# Altium PCB MiniGateway4G0409.PcbDoc
Units mil, origin at the board's own origin, x right, y up, seen from the top; angles counter-clockwise.
Board outline 6000 x 4000 mil, 2 copper layers (Top Layer, Bottom Layer); 71 components, 75 nets, 396 pads, 105 vias.
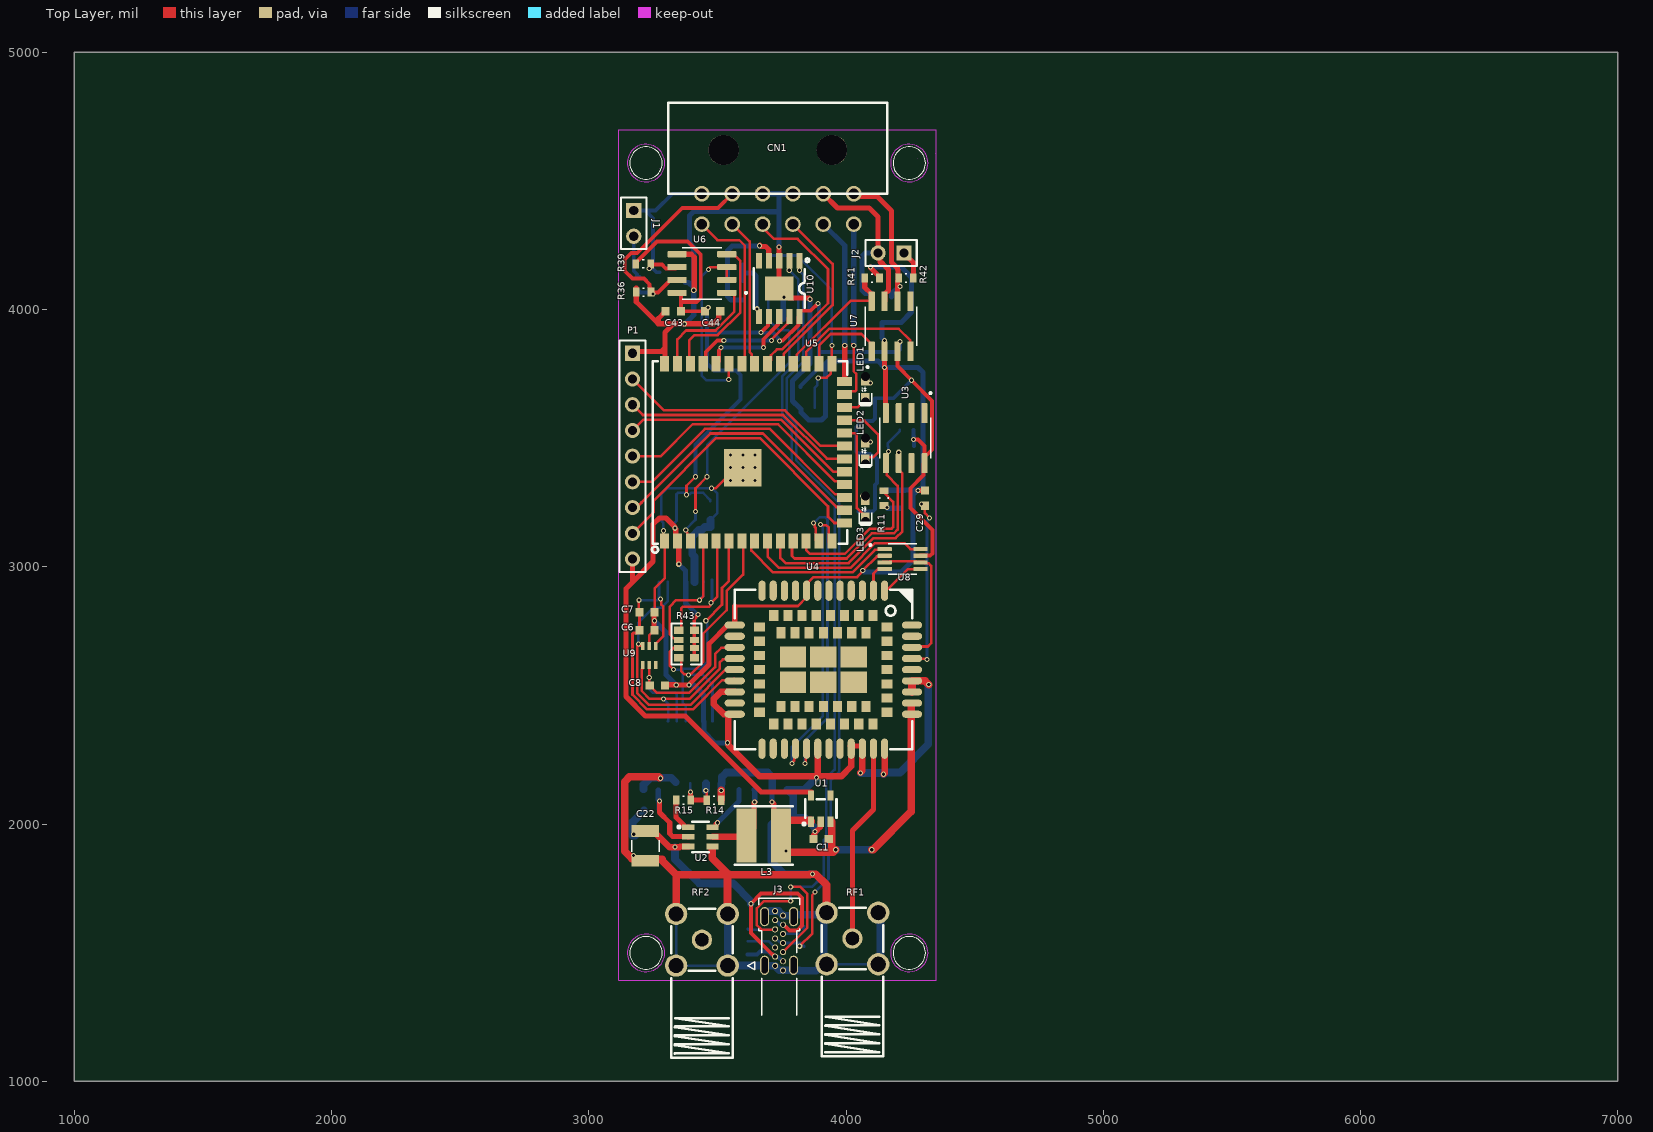
[diagram p0: Top Layer view]
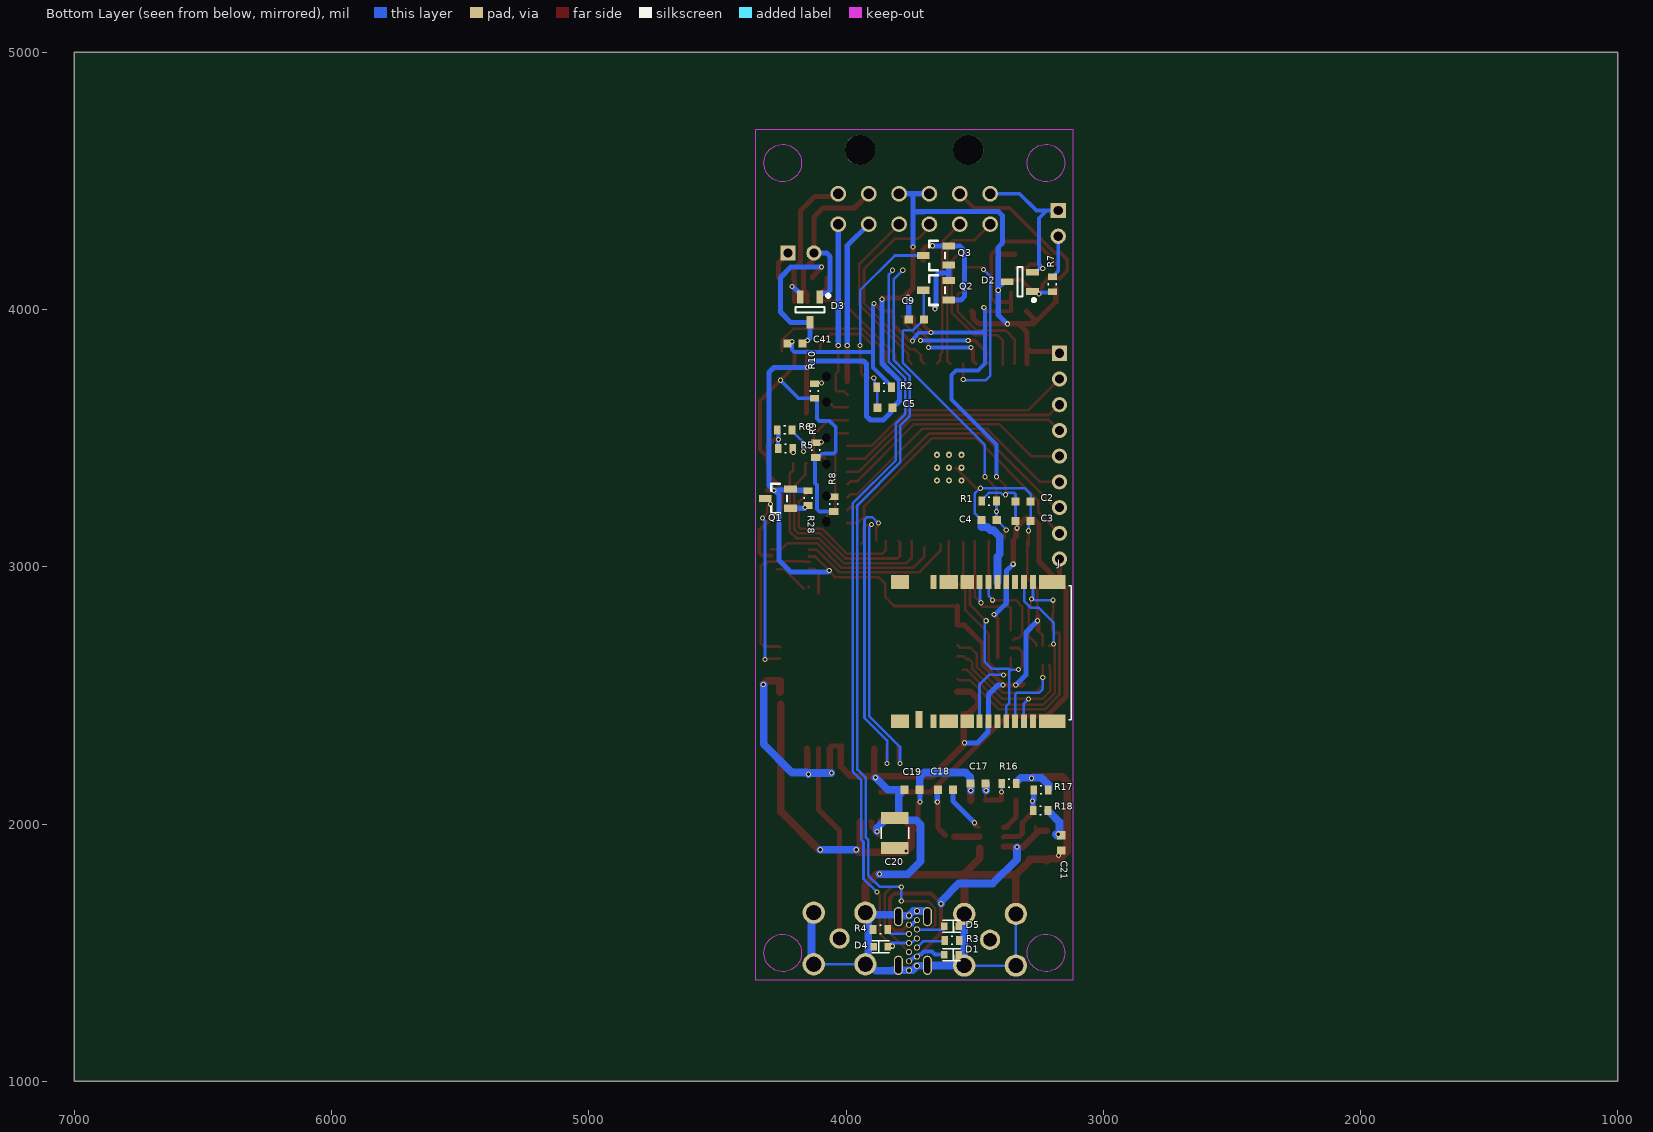
[diagram p1: Bottom Layer view, seen from below]

## Layer stack, top to bottom
Top Solder: solder mask 0.4, Solder Resist, Dk 3.5
Top Layer: signal copper 1.4
Dielectric 1: dielectric 12.6, FR-4, Dk 4.8
Bottom Layer: signal copper 1.4
Bottom Solder: solder mask 0.4, Solder Resist, Dk 3.5

## Board outline
1000,1000 7000,1000 7000,5000 1000,5000

## Design rules (kind name [scope] priority, off if disabled: settings)
Clearance [All] p1: gap=8 ignorepadtopadclearanceinfootprint=FALSE
PolygonConnect [All] p1: connectstyle=Relief reliefconductorwidth=10 reliefentries=4 polygonreliefangle="90 Angle" airgapwidth=10
RoutingVias [All] p1: holewidth=28 width=50 viastyle="Through Hole" minholewidth=28 minwidth=50 maxholewidth=28 maxwidth=50
SolderMaskExpansion [All] p1: expansion=4 istentingtop=FALSE
Width [All] p1: maxlimit=30 minlimit=10 preferedwidth=10
30 further rules are at their usual default settings.

## Classes and differential pairs
component class RS485: C43 C44 D2 J1 R7 R36 R39 U6
component class POWER: C1 C17 C18 C19 C20 C21 C22 L3 R14 R15 R16 R17 R18 U1 U2
component class My4G: C6 C7 C8 C29 J Q1 R11 R28 RF1 U4 U8 U9
component class MCU: C2 C3 C4 C5 C9 CN1 D1 D4 D5 J3 LED1 LED2 LED3 P1 Q2 Q3 R1 R2 R3 R4 R5 R6 R8 R9 R10 R43 RF2 U3 U5 U10
component class CANBUS: C41 D3 J2 R41 R42 U7

## Components (designator, comment, footprint, x,y, rotation, side; value= is the part's Value field where it differs from the comment)
C1 "10uf/0603" CAP0603 3905,1940 r0 top value=10uf
C2 "10uF/0603" CAP0603 3313.25,3255 r0 bottom
C3 "0.1uF/0603" CAp0603 3313.25,3180 r0 bottom value=0.22uF/0603
C4 "0.1uF/0603" CAP0603 3441.75,3180 r180 bottom value=0.1uF
C5 "0.1uF/0603" CAP0603 3850,3620 r0 bottom value=0.1uF
C6 "0.1uF/0603" CAP0603 3225,2755 r180 top
C7 "22pF/0603" CAP0603 3225,2825 r180 top
C8 "22pF/0603" CAP0603 3265,2540 r180 top
C9 "1uF/0603" CAP0603 3725,3960 r180 bottom value=0.1uF
C17 "330pF/0603" CAP0603 3485,2155 r180 bottom value=330pF/0603/25V
C18 "0.1uF/0603" CAP0603 3615,2135 r0 bottom value=0.1uF/0603/50V
C19 "0.1uF/0603" CAP0603 3745,2135 r0 bottom locked value=0.1uF/0603/50V
C20 "22uF/1210" CAP1210-CAPC3225X140N 3810,1965 r90 bottom value=22uF/1210/35V
C21 "0.1uF/0603" CAP0603 3165,1925 r270 bottom value=0.1uF/0603/50V
C22 "10uF/1210" CAP1210-CAPC3225X140N 3220,1915 r270 top value=10uF/1210/35V
C29 "NC" CAP0603 4305,3265 r270 top
C41 "0.1uF/0603" CAP0603 4200,3870 r0 bottom
C43 "0.1uF/0603" CAP0603 3330,3991.42 r0 top value=100pF
C44 "10uf/0603" CAP0603 3480,3995 r180 top value=10uf
CN1 "MX3.0MM-2X6P" 3.0MM-2X6P 3734.7,4555.36 r0 top
D1 "LESD5D5.0CT1G" LESD5D5.0CT1G-SOD-523 3590,1495 r180 bottom
D2 "SM712" SOT95P280X135-3N 3324.21,4107.4 r0 bottom
D3 "SM712" SOT95P280X135-3N 4140,3999.21 r270 bottom
D4 "LESD5D5.0CT1G" LESD5D5.0CT1G-SOD-523 3865,1520 r0 bottom
D5 "LESD5D5.0CT1G" LESD5D5.0CT1G-SOD-523 3590,1605 r180 bottom
J "SIM-TF二合一卡座" MOLEX_104642-1610 3125,2670 r90 bottom locked
J1 "Jumper" HDR1X2 3175,4385 r270 top
J2 "Jumper" HDR1X2 4225,4220 r180 top
J3 "TYPEC Side Plug" "TYPE-C side plug" 3740,1250 r0 top
L3 "10uH" IND-SMD_L4.7-W4.7-6.5uH 3680,1955 r180 top
LED1 "0603LED-红" LED_0603_KA 4075,3690 r90 top
LED2 "0603LED-红" LED_0603_KA 4075,3450 r90 top
LED3 "0603LED-红" LED_0603_KA 4075,3225 r90 top
P1 "Header 9" HDR1X9 3170,3830 r270 top
Q1 "2N7002" SOT-23_2N7002 4265,3265 r180 bottom
Q2 "2N7002" SOT-23_2N7002 3650,4075 r180 bottom
Q3 "2N7002" SOT-23_2N7002 3650,4210 r180 bottom
R1 "10K/0603" RES0603 3445.23,3252.68 r0 bottom
R2 "10k/0603" RES0603 3850,3700 r180 bottom value=10k
R3 "4.7K/0603" RES0603 3590,1545 r0 bottom
R4 "4.7K/0603" RES0603 3864.77,1592.32 r180 bottom
R5 "10K/0603" RES0603 4236.85,3457.32 r0 bottom
R6 "10K/0603" RES0603 4240,3530 r0 bottom
R7 "120R/0603" RES0603 3200,4100 r90 bottom
R8 "2K/0603" RES0603 4050,3245 r90 bottom
R9 "2K/0603" RES0603 4120,3455 r90 bottom
R10 "2K/0603" RES0603 4125,3685 r90 bottom
R11 "2k/0603" RES0603 4150,3265 r270 top
R14 "125k/0603" RES0603 3485,2090 r180 top
R15 "2k/0603" RES0603 3370,2095 r0 top
R16 "30.0k/0603" RES0603 3365,2160 r180 bottom
R17 "2k/0603" RES0603 3240,2135 r180 bottom
R18 "2k/0603" RES0603 3245,2050 r0 bottom
R28 "30.0k/0603" RES0603 4145,3265 r270 bottom
R36 "4.7k/0603" RES0603 3215,4070 r0 top
R39 "4.7k/0603" RES0603 3210,4175 r180 top
R41 "10K/0603" RES0603 4100,4120 r180 top
R42 "120R/0603" RES0603 4235,4125 r0 top
R43 "10k" RES-ARRAY-SMD_8P-L3.2-W1.6-P0.80-BL 3380,2700 r270 top
RF1 "SMA 4脚拐弯射频天线插座" SMA-TH_BWSMA-KWE-Z001 4025.01,1395.42 r270 top
RF2 "SMA弯头外螺内孔转IPEX1代" SMA-TH_BWSMA-KWE-Z001 3440.01,1390.42 r270 top
U1 "ME6217C33-SOT23-5" ME6217C33-SOT23-5 3900,2060 r270 top locked
U2 "SCT2332TVBR" SCT2332TVBR-TSOT23-6 3435,1945 r270 top
U3 "ATECC608" "SOIC127P600X175-8N - duplicate" 4230,3500 r270 top
U4 "A7680C" LCC-LAG_L17.6-W15.7_A7680C 3911.98,2599.99 r0 top
U5 "ESP32-S2-SOLO-U-N8R2" ESP32-S2-SOLO-U 3633.45,3436.62 r90 top
U6 "SP3485" SP3485-SOP8 3440,4140 r180 top locked
U7 "SN65HVD230DR" SN65HVD230DR 4175,3935 r90 top
U8 "TXS0102DCTTG4" TXS0102 4220,3030 r0 top
U9 "SMF05CT1" SMF05C-SC706 3235,2660 r180 top
U10 "CH340K" "ESOP-10_L4.9-W3.9-P1.00-LS6.2-BL-EP CH340K" 3746.81,4081.74 r180 top locked

## Footprints (in the part's own frame and the unit in brackets; to place one, negate y for a bottom-side part, rotate by r counter-clockwise, add the part's x,y. Pads: shape width x height; smd on the part's side, far side on the other; paste and mask are expansions set on the pad)
3.0MM-2X6P [mm]
  round 1.55 hole 1.05 paste+0 mask+0.102: 1(-7.496,-5.676) 2(-7.496,-2.676) 3(-4.496,-5.676) 4(-4.496,-2.676) 5(-1.499,-5.676) 6(-1.499,-2.676) 7(1.501,-5.676) 8(1.501,-2.676) 9(4.501,-5.676) 10(4.501,-2.676) 11(7.501,-5.676) 12(7.501,-2.676)
  round 3 hole 3 paste+0 mask+0.102: 17(5.35,1.644) 18(-5.35,1.644)
  silkscreen extent -10.8,-2.68 10.8,6.32
CAP0603 [mm]
  rect 0.8x0.8 smd: 1(-0.791,0.046) 2(0.709,0.046)
CAp0603 [mm]
  rect 0.8x0.8 smd: 1(-0.791,0.046) 2(0.709,0.046)
CAP1210-CAPC3225X140N [mm] "CAP1210"
  rect 1.16x2.72 smd: 1(-1.475,0) 2(1.475,0)
  silkscreen extent -0.57,-1.35 0.57,1.35
"ESOP-10_L4.9-W3.9-P1.00-LS6.2-BL-EP CH340K" [mm] "CH340K"
  rect 0.6x1.5 smd paste+0 mask+0.051: 1(-1.843,-2.75) 2(-0.843,-2.75) 3(0.157,-2.75) 4(1.157,-2.75) 5(2.157,-2.75) 6(2.157,2.75) 7(1.157,2.75) 8(0.157,2.75) 9(-0.843,2.75) 10(-1.843,2.75)
  rect 2.8x2.4 smd paste+0 mask+0.051: 11(0.157,0)
  silkscreen extent -2.78,-2.96 2.66,2
ESP32-S2-SOLO-U [mm]
  rect 1.5x0.9 smd paste+0 mask+0.05: 1(-8.55,8.597) 2(-8.55,7.327) 3(-8.55,6.057) 4(-8.55,4.787) 5(-8.55,3.517) 6(-8.55,2.247) 7(-8.55,0.977) 8(-8.55,-0.293) 9(-8.55,-1.563) 10(-8.55,-2.833) 11(-8.55,-4.103) 12(-8.55,-5.373) 13(-8.55,-6.643) 14(-8.55,-7.913) 27(8.95,-7.913) 28(8.95,-6.643) 29(8.95,-5.373) 30(8.95,-4.103) 31(8.95,-2.833) 32(8.95,-1.563) 33(8.95,-0.293) 34(8.95,0.977) 35(8.95,2.247) 36(8.95,3.517) 37(8.95,4.787) 38(8.95,6.057) 39(8.95,7.327) 40(8.95,8.597)
  rect 0.9x1.5 smd paste+0 mask+0.05: 15(-6.785,-9.163) 16(-5.515,-9.163) 17(-4.245,-9.163) 18(-2.975,-9.163) 19(-1.705,-9.163) 20(-0.435,-9.163) 21(0.835,-9.163) 22(2.105,-9.163) 23(3.375,-9.163) 24(4.645,-9.163) 25(5.915,-9.163) 26(7.185,-9.163)
  rect 3.7x3.7 smd paste+0 mask+0.05: 41(-1.3,0.877)
  silkscreen extent -9.7,-9.41 9.2,9.85
HDR1X2 [mm] "Connector; Header; 2 Position"
  rect 1.5x1.5 hole 0.9: 1(0,0)
  round 1.5 hole 0.9: 2(2.54,0)
  silkscreen extent -1.27,-1.27 3.81,1.27
HDR1X9 [mm] "Connector; Header; 9 Position"
  rect 1.5x1.5 hole 0.9: 1(0,0)
  round 1.5 hole 0.9: 2(2.54,0) 3(5.08,0) 4(7.62,0) 5(10.16,0) 6(12.7,0) 7(15.24,0) 8(17.78,0) 9(20.32,0)
  silkscreen extent -1.27,-1.27 21.59,1.27
IND-SMD_L4.7-W4.7-6.5uH [mm] "6.5uH"
  rect 2x5.3 smd paste+0 mask+0.051: 1(-1.7,0) 2(1.7,0)
  silkscreen extent -2.85,-2.9 2.85,2.9
LCC-LAG_L17.6-W15.7_A7680C [mm] "A7680C"
  oval 0.7x2 smd paste+0 mask+0.051: 1(6.05,7.8) 2(4.95,7.8) 3(3.85,7.8) 4(2.75,7.8) 5(1.65,7.8) 6(0.55,7.8) 7(-0.55,7.8) 8(-1.65,7.8) 9(-2.75,7.8) 10(-3.85,7.8) 11(-4.95,7.8) 12(-6.05,7.8) 22(-6.05,-7.8) 23(-4.95,-7.8) 24(-3.85,-7.8) 25(-2.75,-7.8) 26(-1.65,-7.8) 27(-0.55,-7.8) 28(0.55,-7.8) 29(1.65,-7.8) 30(2.75,-7.8) 31(3.85,-7.8) 32(4.95,-7.8) 33(6.05,-7.8)
  oval 2x0.7 smd paste+0 mask+0.051: 13(-8.75,4.4) 14(-8.75,3.3) 15(-8.75,2.2) 16(-8.75,1.1) 17(-8.75,0) 18(-8.75,-1.1) 19(-8.75,-2.2) 20(-8.75,-3.3) 21(-8.75,-4.4) 34(8.75,-4.4) 35(8.75,-3.3) 36(8.75,-2.2) 37(8.75,-1.1) 38(8.75,0) 39(8.75,1.1) 40(8.75,2.2) 41(8.75,3.3) 42(8.75,4.4)
  rect 0.9x1.1 smd paste+0 mask+0.051: 43(4.9,5.35) 44(3.5,5.35) 45(2.1,5.35) 46(0.7,5.35) 47(-0.7,5.35) 48(-2.1,5.35) 49(-3.5,5.35) 50(-4.9,5.35) 58(-4.9,-5.35) 59(-3.5,-5.35) 60(-2.1,-5.35) 61(-0.7,-5.35) 62(0.7,-5.35) 63(2.1,-5.35) 64(3.5,-5.35) 65(4.9,-5.35) 73(4.2,3.65) 74(2.8,3.65) 75(1.4,3.65) 76(0,3.65) 77(-1.4,3.65) 78(-2.8,3.65) 79(-4.2,3.65) 80(-4.2,-3.65) 81(-2.8,-3.65) 82(-1.4,-3.65) 83(0,-3.65) 84(1.4,-3.65) 85(2.8,-3.65) 86(4.2,-3.65)
  rect 1.1x0.9 smd paste+0 mask+0.051: 51(-6.3,4.2) 52(-6.3,2.8) 53(-6.3,1.4) 54(-6.3,0) 55(-6.3,-1.4) 56(-6.3,-2.8) 57(-6.3,-4.2) 66(6.3,-4.2) 67(6.3,-2.8) 68(6.3,-1.4) 69(6.3,0) 70(6.3,1.4) 71(6.3,2.8) 72(6.3,4.2)
  rect 2.6x2.1 smd paste+0 mask+0.051: 87(3,1.25) 88(0,1.25) 89(-3,1.25) 90(-3,-1.25) 91(0,-1.25) 92(3,-1.25)
  silkscreen extent -8.76,-7.87 8.76,7.87
LED_0603_KA [mil]
  rect 31.5x31.5 smd paste+0 mask+2: 1(30,0) 2(-30,0)
  round 30 hole 35 paste+0 mask+1.97: 1(50,0) 2(-50,0)
  silkscreen extent -61,-25 10,23
LESD5D5.0CT1G-SOD-523 [mm] "TVS LESD5D5.0CT1G  乐山无线电"
  rect 0.65x0.75 smd paste+0 mask+0.051: 1(-0.7,-0.074) 2(0.7,-0.074)
  silkscreen extent -0.85,-0.67 0.85,0.53
ME6217C33-SOT23-5 [mm] "SOT-23-5_L3.0-W1.7-P0.95-LS2.8-BR"
  rect 1x0.6 smd paste+0 mask+0.051: 1(1.3,-0.899) 2(1.3,0.05) 3(1.3,1) 4(-1.3,1.001) 5(-1.3,-0.899)
  silkscreen extent -0.9,-1.73 1.65,1.6
MOLEX_104642-1610 [mm]
  rect 1.35x2.6 smd: G1(-6.875,1.85) G8(6.875,1.85)
  rect 1.35x1.34 smd: G2(-6.875,10.25) G7(6.875,10.25)
  rect 1.35x1.84 smd: G3(-6.875,12.09) G6(6.875,12.09)
  rect 1.35x1.8 smd: G4(-6.875,16.9) G5(6.875,16.9)
  rect 1.35x0.58 smd: S1_C1(6.875,3.76) S2_C2(6.875,4.64) S3_C3(-6.875,4.64) S4(-6.875,3.76) S5_C4(6.875,7.28) S6_C5(6.875,5.52) S7_C6(-6.875,5.52) S8(-6.875,7.28) T1(6.875,13.6) T2(6.875,9.04) T3(6.875,8.16) T4(6.875,6.4) T5(-6.875,6.4) T6(-6.875,8.16) T7(-6.875,9.04) T8(-6.875,13.6)
  rect 1.7x0.7 smd: S/W(-6.7,15.015)
  silkscreen extent -6.7,0 6.5,0.23
RES0603 [mm]
  rect 0.65x0.9 smd: 1(-0.768,-0.059) 2(0.682,-0.059)
  silkscreen extent -0.12,-0.46 0.04,0.34
RES-ARRAY-SMD_8P-L3.2-W1.6-P0.80-BL [mm]
  rect 0.75x0.9 smd paste+0 mask+0.051: 1(-1.35,-0.77) 4(1.35,-0.77) 5(1.35,0.77) 8(-1.35,0.77)
  rect 0.58x0.9 smd paste+0 mask+0.051: 2(-0.4,-0.77) 3(0.4,-0.77) 6(0.4,0.77) 7(-0.4,0.77)
  silkscreen extent -2.02,-1.47 2.02,1.47
SCT2332TVBR-TSOT23-6 [mm] "SCT2332TVBR"
  rect 0.55x1.2 smd paste+0 mask+0.051: 1(-1.077,-1.228) 2(-0.127,-1.228) 3(0.823,-1.228) 4(0.823,1.172) 5(-0.127,1.172) 6(-1.077,1.172)
  silkscreen extent -1.63,-2.28 1.37,0.77
SMA-TH_BWSMA-KWE-Z001 [mm]
  round 2.2 hole 1.45 slot 1.455 at 0 deg paste+0 mask+0.051: 1(-6.604,-2.55) 2(-6.604,2.55) 3(-1.504,2.55) 4(-1.504,-2.55)
  round 2 hole 1.3 slot 1.305 at 0 deg paste+0 mask+0.051: 5(-4.053,0)
  silkscreen extent -7.1,-3.05 7.58,3.05
SMF05C-SC706 [mm] "SMF05C"
  rect 0.35x0.8 smd paste-1 mask+0: 1(-0.65,-0.823) 2(0,-0.823) 3(0.65,-0.823) 4(0.65,1.077) 5(0,1.077) 6(-0.65,1.077)
SN65HVD230DR [mm]
  rrect25% 1.97x0.6 smd: 1(-2.47,1.905) 2(-2.47,0.635) 3(-2.47,-0.635) 4(-2.47,-1.905) 5(2.47,-1.905) 6(2.47,-0.635) 7(2.47,0.635) 8(2.47,1.905)
  silkscreen extent -4.14,-2.52 1.95,2.52, body extent -3,-2.45 3,2.45, height 1.75
"SOIC127P600X175-8N - duplicate" [mm]
  rrect25% 1.97x0.59 smd: 1(-2.475,1.905) 2(-2.475,0.635) 3(-2.475,-0.635) 4(-2.475,-1.905) 5(2.475,-1.905) 6(2.475,-0.635) 7(2.475,0.635) 8(2.475,1.905)
  silkscreen extent -4.54,-2.52 2,2.59
SOT95P280X135-3N [mm] "SM712"
  rect 1.25x0.65 smd: 1(-1.25,0.95) 2(-1.25,-0.95) 3(1.25,0)
  silkscreen extent -1.48,-1.45 0.25,1.9
SOT-23_2N7002 [mm]
  rect 1.25x0.7 smd paste+0 mask+0.102: 1(1.25,-0.95) 2(1.25,0.95) 3(-1.25,0)
  silkscreen extent -0.65,-1.46 0.9,1.46
SP3485-SOP8 [mm]
  rrect25% 1.9x0.6 smd: 1(-2.455,1.905) 2(-2.455,0.635) 3(-2.455,-0.635) 4(-2.455,-1.905) 5(2.455,-1.905) 6(2.455,-0.635) 7(2.455,0.635) 8(2.455,1.905)
  silkscreen extent -4.45,-2.52 1.95,2.52, body extent -3,-2.45 3,2.45, height 1.75
TXS0102 [mm]
  rrect25% 1.42x0.4 smd: 1(-1.77,0.975) 2(-1.77,0.325) 3(-1.77,-0.325) 4(-1.77,-0.975) 5(1.77,-0.975) 6(1.77,-0.325) 7(1.77,0.325) 8(1.77,0.975)
  silkscreen extent -3.29,-1.5 1.4,1.5, body extent -2,-1.47 2,1.47, height 1.3
"TYPE-C side plug" [mm]
  round 0.6 hole 0.4 mask+0.064: A1(-0.39,5.05) A4(-0.39,5.95) A5(-0.39,6.85) A6(-0.39,7.75) A7(-0.39,8.65) A9(-0.39,9.55) A12(-0.39,10.45) B1(0.39,10) B4(0.39,9.1) B5(0.39,8.2) B6(0.39,7.3) B7(0.39,6.4) B9(0.39,5.5) B12(0.39,4.6)
  oval 0.9x1.9 hole 0.6 slot 1.6 at 90 deg mask+0.064: SH1(-1.43,5.1) SH2(1.43,5.1) SH3(-1.43,9.9) SH4(1.43,9.9)
  silkscreen extent -3.1,0.15 2.03,11.7

## Part data
C1 C43 C44: library part "Cap Semi", "Capacitor (Semiconductor SIM Model)", LatestRevisionDate=29-May-2009, LatestRevisionNote="IPC-7351 Footprint Added.", PackageDescription="Chip Capacitor", PackageReference=C1206, Published=8-Jun-2000, Publisher="Altium Limited"
C2 C3 C4 C5 C9: library part C0805C220J5RAC7800, "CAP CER SMD 0805 22PF 5% 50V X7R", Capacitance=22pF, Device Package="0805 (2012 Metric)", Manufacturer=KEMET, Operating Temperature="-55°C ~ 125°C", Supplier Part Number 1=399-17625-1-ND, Temperature Coefficient=X7R, Tolerance=±5%, Voltage - Rated=50V, Applications="Bypass, Decoupling", ComponentLink1Description=Datasheet, ComponentLink1URL=https://api.kemet.com/component-edge/download/datasheet/C0805C220J5RAC7800.pdf, ComponentLink2Description="DigiKey Link", ComponentLink2URL=http://digikey.com/product-detail/en/kemet/C0805C220J5RAC7800/399-17625-1-ND/8572625, LastUpdated="02.09.2020 01:04:09", Lifecycle Status=Active, Minimum Order=1, Mounting Type="Surface Mount, MLCC", Package / Case="0805 (2012 Metric)", Packaging=TapeAndReel, Part Number=C0805C220J5RAC7800, Part Status=Active, PartId=17442, Price=0.03, Series="SMD Comm X7R", Size / Dimension="0.079\" L x 0.049\" W (2.00mm x 1.25mm)", Supplier 1=DigiKey, Thickness (Max)="0.035\" (0.88mm)"
C6 C7 C8 C29: library part Discrete_C*_-0603, Add into BOM=yes, Convert to PCB=yes, Device=Discrete_C*_-0603, Origin Footprint=0603, Symbol=Discrete_C*_-0603
  C6: Name=0.1uF
  C7: Name=33pF
  C8: Name=22pF/0603
  C29: Name=NC
C17 C18 C19 C20 C21 C22: library part CAP0603, "SURFACE MOUNT CAPACITOR 0.031 X 0.061 INCHES", Manufacturer #1="IPC SM-782 STD.", Add into BOM=yes, Convert to PCB=yes, Device=CAP0603, Name=CAP0603, OldName=CAP0603, Origin Footprint=0603, PCB DECAL=0603, Sim_Analog_Order=Model$, Symbol=CAP0603
C41: library part 100nF, JLCPCB Part Class="Basic Part", Manufacturer=SAMSUNG, Manufacturer Part=CL05B104KO5NNNC, Add into BOM=yes, Convert to PCB=yes, Device=100nF, Name=100nF, Origin Footprint=C0402_NEW, Supplier=LCSC, Supplier Part=C1525, Symbol=100nF
CN1: library part A2005WR-2X6P
D1 D4 D5: JLCPCB Part Class="Extended Part", Manufacturer="Leshan Radio", Add into BOM=yes, Convert to PCB=yes, Device=LESD5D5.0CT1G, Manufacturer Part=LESD5D5.0CT1G, Name=LESD5D5.0CT1G, Origin Footprint=SOD-523_L1.2-W0.8-LS1.6-BI, Supplier=LCSC, Supplier Part=C383211, Symbol=LESD5D5.0CT1G
D2 D3: library part SM05_D24, Part Number=702112964, Design=3, Origin=Altium, PCB Footprint=SOT95P280X135-3N
J: library part 104642-1610, "17 (16 + 1) Position Card Connector Combo - microSDâ„¢, Micro SIM Surface Mount, Right Angle Gold or Gold-Palladium", Package=None, Availability=Warning, MF=Molex, Mouser-Purchase-URL=https://snapeda.com/shop?store=Mouser&id=501052, MP=104642-1610, Price=None, SnapEDA_Link=https://www.snapeda.com/parts/104642-1610/Molex/view-part/501052/?ref=snap
J1 J2: library part "Header 2", "Header, 2-Pin", LatestRevisionDate=17-Jul-2002, LatestRevisionNote="Re-released for DXP Platform.", Publisher="Altium Limited"
J3: Package=None, Availability=Unavailable, MF="{'manufacturer': u'Molex'}", MP=2169890001, Price=None
L3: library part IND-MOLDED, "0503贴片电感", Description" MOLDED INDUCTOR, 0_5="PIN SPACING", Add into BOM=yes, Convert to PCB=yes, Device=IND-MOLDED, Name=IND-MOLDED, OldName=IND-MOLDED, Origin Footprint=L_0650, PCB DECAL=L_0650, Sim_Analog_Order=Model$, Sim_Analog_Prefix=L, Symbol=IND-MOLDED
LED1 LED2 LED3: library part LED, "0603LED-红，兼容直插", JLCPCB Part Class="Basic Part", Manufacturer=EVERLIGHT, Manufacturer Part=19-217/GHC-YR1S2/3T, Add into BOM=yes, Convert to PCB=yes, Device=19-217/GHC-YR1S2/3T, Name=19-217/GHC-YR1S2/3T, Origin Footprint=LED0603-R-RD, Supplier=LCSC, Supplier Part=C72043, Symbol=19-217/GHC-YR1S2/3T
P1: "Header, 9-Pin", LatestRevisionDate=17-Jul-2002, LatestRevisionNote="Re-released for DXP Platform.", Publisher="Altium Limited"
Q1 Q2 Q3: "Nmos 2N7000, 2N7002, NDS7002A"
R1 R2 R5 R6: library part RPC0805JT100R-UP, "RES, PULSE, 0805, 5%, 100 OHM, 0", Device Package="0805 (2012 Metric)", Manufacturer="Stackpole Electronics Inc", Operating Temperature="-55°C ~ 155°C", Power (Watts)="0.5W, 1/2W", Ratings=AEC-Q200, Resistance="100 Ohms", Supplier Device Package=0805, Supplier Part Number 1=RPC0805JT100R-UPCT-ND, Temperature Coefficient=±200ppm/°C, Tolerance=±5%, ComponentLink1Description=Datasheet, ComponentLink1URL=https://www.seielect.com/catalog/sei-rpc.pdf, ComponentLink2Description="DigiKey Link", ComponentLink2URL=http://digikey.com/product-detail/en/stackpole-electronics-inc/RPC0805JT100R-UP/RPC0805JT100R-UPCT-ND/10109071, Composition="Thick Film", Features="Automotive AEC-Q200, Pulse Withstanding", Height - Seated (Max)="0.024\" (0.60mm)", LastUpdated="02.09.2020 01:15:08", Lifecycle Status=Active, Minimum Order=1, Number of Terminations=2, Package / Case="0805 (2012 Metric)", Packaging=TapeAndReel, Part Number=RPC0805JT100R-UP, Part Status=Active, PartId=35188, Price=0.02, Series=RPC, Size / Dimension="0.079\" L x 0.049\" W (2.00mm x 1.25mm)", Supplier 1=DigiKey
R3 R4: library part 5.1K, JLCPCB Part Class="Basic Part", Manufacturer=UniOhm, Manufacturer Part=0402WGF5101TCE, Add into BOM=yes, Convert to PCB=yes, Device=5.1K, Name=5.1K, Origin Footprint=R0402, Supplier=LCSC, Supplier Part=C25905, Symbol=5.1K
R7 R14 R15 R16 R17 R18: library part Res2, "Resistor", LatestRevisionDate=17-Jul-2002, LatestRevisionNote="Re-released for DXP Platform.", PackageDescription="Axial Device, Thru-Hole; 2 Leads; 0.4 in Pin Spacing", PackageReference=AXIAL-0.4, Published=8-Jun-2000, Publisher="Altium Limited"
R8 R9 R10: library part 2.2K, JLCPCB Part Class="Basic Part", Manufacturer=UniOhm, Manufacturer Part=0402WGF2201TCE, Add into BOM=yes, Convert to PCB=yes, Device=2.2K, Name=2K/0603, Origin Footprint=R0402, Supplier=LCSC, Supplier Part=C25879, Symbol=2.2K
R11 R36 R39: library part Res2, LatestRevisionDate=17-Jul-2002, LatestRevisionNote="Re-released for DXP Platform.", PackageDescription="Axial Device, Thru-Hole; 2 Leads; 0.4 in Pin Spacing", PackageReference=AXIAL-0.4, Published=8-Jun-2000, Publisher="Altium Limited"
R28: library part Discrete_R*_-0603, Add into BOM=yes, Convert to PCB=yes, Device=Discrete_R*_-0603, Name=47K/0603, Origin Footprint=R0603, Symbol=Discrete_R*_-0603
R41: library part 10K, JLCPCB Part Class="Basic Part", Manufacturer=UniOhm, Manufacturer Part=0402WGF1002TCE, Add into BOM=yes, Convert to PCB=yes, Device=10K, Name=10K, Origin Footprint=R0402, Supplier=LCSC, Supplier Part=C25744, Symbol=10K
R42: library part 120, JLCPCB Part Class="Extended Part", Manufacturer=RALEC, Manufacturer Part=RTT061200FTP, Add into BOM=yes, Convert to PCB=yes, Device=120, Name=120, Origin Footprint=R1206, Supplier=LCSC, Supplier Part=C159715, Symbol=120
R43: library part 2.2K排阻-4D03, "电阻排-4D03"
RF1: library part BWSMA-KWE-Z001
RF2: library part BWSMA-KWE-Z001, "SMA 4脚拐弯射频天线插座，https://item.taobao.com/item.htm?abbucket=8&id=645371264157&ns=1&sku_properties=1627207:22096496743&spm=a21n57.1.item.1.71b2523c1yKr0E"
U1: library part ME6217C33M5G, "4.2v-3.3v LDO"
U2: "3.8V-32V Vin, 3A Synchronous Step-down DCDC Converter"
U3: library part 24CXX, "microchip 加密芯片 IIC，SOIC封装"
U4: library part A7680C-LAAS, "4G cat1 module"
U5: library part ESP32-S2-SOLO-U-N4
U6: "485总线芯片"
U7: "3.3 V CAN Transceiver with Standby Mode", Package="SOIC-8 Texas Instruments", Availability="In Stock", Check_prices=https://www.snapeda.com/parts/SN65HVD230DR/Texas+Instruments/view-part/?ref=eda, MF="Texas Instruments", MP=SN65HVD230DR, Price=None, Purchase-URL=https://pricing.snapeda.com/search/part/SN65HVD230DR/?ref=eda, SnapEDA_Link=https://www.snapeda.com/parts/SN65HVD230DR/Texas+Instruments/view-part/?ref=snap
U8: "2-Bit Bidirectional Voltage-Level Shifter for Open-Drain and Push-Pull Application 8-SM8 -40 to 85", Package="SSOP-8 Texas Instruments", Check_prices=https://www.snapeda.com/parts/TXS0102DCTTG4/Texas+Instruments/view-part/?ref=eda, MF="Texas Instruments", MP=TXS0102DCTTG4, SnapEDA_Link=https://www.snapeda.com/parts/TXS0102DCTTG4/Texas+Instruments/view-part/?ref=snap
U9: "12.5V Clamp 8A (8/20Âµs) Ipp Tvs Diode Surface Mount SC-88/SC70-6/SOT-363", Package="SOT-363 ON Semiconductor", Availability="In Stock", Check_prices=https://www.snapeda.com/parts/SMF05CT1/Onsemi/view-part/?ref=eda, MF="ON Semiconductor", MP=SMF05CT1, Price=None, Purchase-URL=https://pricing.snapeda.com/search/part/SMF05CT1/?ref=eda, SnapEDA_Link=https://www.snapeda.com/parts/SMF05CT1/Onsemi/view-part/?ref=snap
U10: "usb转串口，用于下载使用。"

## Via types
v1: diameter 20, hole 12, Top Layer to Bottom Layer, 96 vias
v2: diameter 24, hole 12, Top Layer to Bottom Layer, 9 vias

## Nets (pads, with @x,y where several pads share a name; then routed paths per layer and width w, separated by ;. In a path a pad name is that pad's centre, name@x,y a point inside that pad or via, vN(x,y) a via of type N, cw(c..) or ccw(c..) an arc to the next point about the centre after c; other vN are vias at no path point)
A7680PWR: C29.2 Q1.3 U4.39 | length 668.7
  Top Layer w10: U4.39 4258.12,2641.65 4313.35,2641.65 v1(4315,2640) ; C29.2 4306.79,3208.21 v1(4325,3190)
  Bottom Layer w10: v1(4315,2640) 4315,3177.29 4325,3187.29 v1(4325,3190)
  other v1: 4293,3243.3
CAN0_H: CN1.10 D3.1 J2.2 U7.7 | length 863
  Top Layer w20: CN1.10 3966.9,4395 4090,4395 4125,4360 J2.2 4132.47,4212.53 4132.47,4184.24 4136.72,4180 4140.89,4180 4165,4155.89 4165,4074.21 4151.81,4061.02 4151.81,4034.06 U7.7
  Bottom Layer w20: D3.1 4102.6,4060.24 4099.8,4063.03 4073.28,4063.03 4061.57,4074.75 4061.57,4206.57 4075,4220 J2.2
CAN0_L: CN1.12 D3.2 R42.1 U7.6 | length 583.1
  Top Layer w20: CN1.12@4038.52,4440 4120,4440 4177.47,4382.53 4177.47,4183.02 4200,4160.49 4200,4155 4201.97,4153.03 4201.97,4120.55 4204.77,4117.76 4200,4112.99 U7.6
  Bottom Layer w20: D3.2 4177.4,4060.24 4207.17,4090 v1(4210,4090)
CAN0_RS: R41.2 U5.30 U7.8 | length 515.4
  Top Layer w10: U5.30@3795.79,3789.48 3808.51,3802.2 3808.51,3824.42 4018.14,4034.06 U7.8@4098.19,4034.06
  Top Layer w20: R41.2 4073.15,4086.06 4098.19,4061.02 U7.8@4098.19,4034.06
CAN0_RX: U5.29 U7.4 | length 549.3
  Top Layer w10: U5.29@3845.79,3789.48 3845,3790.27 3845,3835.46 3934.54,3925 4205,3925 4250,3880 U7.4
CAN0_TX: U5.28 U7.1 | length 337.5
  Top Layer w10: U5.28@3895.79,3789.48 3895.79,3860.79 3940,3905 4059.72,3905 4093.19,3871.54 4100,3864.72 U7.1
DTR: Q2.1 Q3.2 U10.4 | length 461
  Top Layer w20: v1@3665,4250 3670,4245 3687.73,4245 3699.45,4233.28 3699.45,4191.81 U10.4
  Bottom Layer w20: Q2.1 3552.4,4037.6 3540,4050 3540,4230 3557.4,4247.4 Q3.2 v1@3662.4,4247.4
  other v1: 3664.3,4247.78
EN: C4.2 C9.2 Q2.3 R1.1 U5.3 | length 1242.4
  Top Layer w10: v1@3375.18,3140 3377.65,3140 3378.97,3138.68 3378.97,3136.22 3383.07,3132.11 3383.07,3113.66 U5.3@3395,3101.73 ; v1(3415,3215) 3415,3305 v1(3460,3350)
  Bottom Layer w10: v1(3377.06,3143.3) 3377.06,3145 C4.2 3415,3182.95 v1(3415,3215) R1.1 ; v1(3460,3350) 3460,3473.94 3780,3793.94 3780,3914.14 3774.14,3920 3738.89,3920 C9.2 3697.1,4072.9 Q2.3
ESP32-RF: RF2.5
ESPIO0: C5.2 Q3.3 R2.1 U5.27 | length 805.3
  Top Layer w10: v1(3892,3733.3) 3893.76,3735.06 3925.06,3735.06 3940,3750 3940,3783.69 3945.79,3789.48 3945,3790.27 v1(3945,3860.5)
  Bottom Layer w10: Q3.3 3810,4210 3945,4075 v1(3945,3860.5) ; C5.2 3877.9,3695.34 3888.03,3705.47 3888.03,3726.62 3892,3730.59 v1(3892,3733.3)
ESPSCL: R5.1 U3.6 U5.10 | length 871.4
  Top Layer w10: U5.10 3745,3034 3765,3014 4010.09,3014 4107.44,3111.35 4193.14,3111.35 4219,3137.21 4219,3362.92 4213.14,3368.78 4211.61,3368.78 4205,3375.39 U3.6
  other v1: 4205,3445
ESPSDA: R6.1 U3.5 U5.11 | length 904.6
  Top Layer w10: U5.11 3790,3095 3790,3042 3800,3032 4002.63,3032 4100.89,3130.26 4186.6,3130.26 4201,3144.66 4201,3314 4158.67,3356.33 4158.67,3398.89 U3.5
  Bottom Layer w10: v1(4165.84,3447.79) 4163.93,3449.7 4163.93,3468.03 4162.16,3469.8 4162.16,3479.8 4209.77,3527.4 R6.1
GND: C1.1 C2.1 C3.1 C4.1 C5.1 C6.1 C7.1 C8.1 C9.1 C19.2 C20.2 C21.2 C22.2 C29.1 C41.1 C43.1 C44.1 CN1.6 CN1.8 D1.2 D2.3 D3.3 D4.2 D5.2 J3.A1 J3.A12 J3.B1 J3.B12 J3.SH1 J3.SH2 J3.SH3 J3.SH4 J.S5_C4 J.T6 P1.1 Q1.2 R3.1 R4.1 R16.2 R17.2 R28.1 R36.1 R41.1 RF1.1 RF1.2 RF1.3 RF1.4 RF2.1 RF2.2 RF2.3 RF2.4 U1.2 U2.4 U3.4 U4.8 U4.13 U4.19 U4.21 U4.27 U4.30 U4.31 U4.33 U4.36 U4.37 U5.1 U5.40 U5.41 U6.5 U7.2 U8.2 U9.2 U10.3 U10.11 | length 15686.5
  Top Layer w10: U9.2 3235,2732.05 C6.1 v1@3256.15,2790.22 ; v1(3255,2790) C7.1@3255,2818.21 ; C7.1 3256.15,2916.15 3295.79,2955.79 U5.1@3295.79,3100.52 ; U5.1@3290,3082.92 v1(3290,3140) ; C8.1@3304.36,2545 3313.68,2545 ; v1@3480,3305 3493.51,3305 U5.41@3573.94,3385.43 ; 3567.5,2847.5 3813.04,2847.5 3847.03,2881.49 U4.8 3847.03,2932.67 3874.36,2960 4042.71,2960 4065,2982.29 v1(4065,2985) 4119.92,3039.92 4142.44,3039.92 U8.2@4145.31,3042.8 ; C29.1@4304.65,3298.3 C29.1
  Top Layer w20: P1.1 3176.5,3836.5 3282.15,3836.5 3295.79,3850.14 ; R36.1@3184.77,4082.68 3184.77,4030.23 3270,3945 ; C6.1@3253.8,2753.68 C7.1@3253.8,2810.95 ; U5.40@3295.79,3789.48 3295.79,3850.14 ; C43.1 3270,3964.36 3270,3945 ; 3313.68,2541.2 3338.8,2541.2 v1(3340,2540) 3341,2541 v1(3389,2541) 3468,2620 3468,2700.95 3540.26,2773.21 U4.13 3567.5,2847.5 ; 3329.54,3944.54 3295.79,3910.79 3295.79,3850.14 ; U6.5 3398.28,4215 3410,4203.28 3410,4076.72 v1(3408.28,4075) ; C44.1 3505.41,3987.46 3505.41,3965.41 3484.54,3944.54 v1(3372.17,3944.54) 3371.72,3945 3329.54,3945 3270,3945 ; v1(3739.3,4242.78) 3739.45,4242.64 3739.45,4183.81 3740,4183.26 U10.11@3740,4081.74 ; U10.11@3741.26,4081.74 3778.5,4044.49 3855.51,4044.49 v1(3860,4040) ; CN1.8@3790,4450 CN1.8 ; C1.1@3873.85,1956.79 3880,1962.95 v1(3880,1971.5) ; v1@3880,1971.14 3883.85,1971.14 3900.18,1987.46 3900.18,2006.77 U1.2@3902.22,2008.82 ; U4.30@4015.26,2302.91 U4.31@4058.55,2302.91 ; v1(4095,4165) 4095,4162.48 4130.23,4127.24 R41.1 ; U7.2 v1(4150,3775) 4153.39,3771.61 U3.4@4153.39,3597.49 ; v1(4279.69,3296.1) 4302.45,3296.1 C29.1@4304.65,3298.3
  Top Layer w25: U4.19 3513.38,2513.38 3486.25,2486.25 3486.25,2465.54 3524.53,2427.25 3542.11,2427.25 3542.6,2426.76 3542.6,2307.4 3665,2185 v1@3880,2185 ; U4.27 3890.32,2185 3981.1,2185 4020.25,2224.15 U4.30 ; v1(4055.87,2198.4) 4063.55,2206.08 U4.31 ; v1(4145.87,2193.4) 4150.18,2197.71 U4.33
  Top Layer w30: C22.2@3173.85,1864.76 3212.17,1864.76 C22.2 ; C22.2@3183.85,1864.76 3168.44,1864.76 3139.63,1893.57 3139.63,2164.63 3158.28,2183.28 3271.72,2183.28 v1@3275,2180 ; C22.2@3230,1862.45 3285.71,1862.45 ; 3285.71,1856.93 3339.61,1803.03 ; RF2.1 3339.61,1803.03 ; U2.4@3480,1905 3480,1866.93 3539.61,1807.32 RF2.2@3539.61,1655.4 ; RF1.1 3924.61,1762.77 3882.38,1805 3860,1805 3858.03,1803.03 3539.61,1803.03 3339.61,1803.03 ; U4.36 U4.37 4306.77,2556.68 v1(4321.62,2541.83)
  Bottom Layer w10: v1(3290,3140) 3290,3170.31 C3.1 C2.1 3282.1,3282.1 3305,3305 3480,3305 3500,3285 3500,3208.89 C4.1 ; RF2.1 RF2.4 RF2.3 ; RF1.4 RF1.3 RF1.2
  Bottom Layer w20: v1(3255,2790) 3300,2745 3300,2580 v1(3340,2540) ; v1(3372.17,3944.54) 3373.69,3944.54 3408.28,3979.14 v1(3408.28,4075) v1@3408.28,4084.35 ; D2.3 3376.22,4104.61 3388.03,4104.61 v1@3408.28,4084.35 ; v1(3389,2541) 3390,2540 3409.21,2540 3446.26,2502.95 J.T6 3447.68,2397.91 3447.68,2357.32 3490,2315 v1@3540,2315 ; CN1.6 3740,4450 ; v1@3740,4245 3740,4380 ; C9.1 3756.15,4041.15 v1@3760,4045 ; CN1.8 3740,4450 ; v1(3860,4040) 3860,3790.5 3792.35,3722.85 3792.35,3644.7 C5.1 3824.59,3612.46 3824.59,3600.41 3855,3570 3905,3570 3920,3585 3920,3788.28 3931.72,3800 4125,3800 v1(4150,3775) 4280,3775 4300,3755 4300,3315 4281.78,3296.78 v1@4279.01,3296.78 ; v1(4065,2985) 4070,2980 4215,2980 4260,3025 4260,3279.64 4277.14,3296.78 v1@4279.01,3296.78 ; v1(4095,4165) 4215,4165 4255,4125 4255,3990 4215,3950 D3.3 4140,3890 v1(4150,3880) ; R28.1@4151.48,3298.2 4152.28,3297.4 Q1.2@4228.41,3297.4 ; Q1.2@4228.41,3298.3 4277.49,3298.3 v1@4279.01,3296.78 ; v1(4279.69,3296.1) v1@4279.01,3296.78 ; v1@3408.28,4084.35 3408.28,4241.72 3391.09,4258.91 3391.09,4364.78 3406.72,4380.41 3695.79,4380.41 3696.2,4380 3740,4380 ; 3740,4380 3740,4450
  Bottom Layer w30: R17.2@3213.15,2135.39 3213.15,2153.15 3240,2180 3320.57,2180 R16.2@3338.15,2162.43 ; J.S5_C4 3411.39,2940.9 3411.39,3039.23 3402.43,3048.19 3402.43,3117.43 3428.04,3143.04 3439.12,3143.04 3451.08,3155 3472.9,3155 C4.1 ; RF2.3@3539.81,1461.03 RF2.2@3539.81,1640.23 ; RF2.3 3540.99,1450.2 3683.11,1450.2 J3.SH1 3685.67,1448.82 J3.A1 3724.65,1448.01 3740.94,1431.72 3754.73,1431.72 J3.B12 3793.79,1431.1 J3.SH2@3796.3,1433.61 ; J3.SH3 3683.7,1657.98 3686.21,1660.49 3704.43,1660.49 3705.35,1661.42 J3.A12 3738.44,1661.42 3755.35,1644.51 J3.B1 J3.SH4@3793.79,1643.7 ; C20.2@3795,2044.02 3795,2111.11 C19.2 3838.21,2133.21 v1(3885,2180) ; J3.SH2 J3.SH2@3796.3,1433.61 ; J3.SH4 3796.3,1645.07 3798.81,1647.58 3916.79,1647.58 RF1.1 ; C20.2@3810,2015 3727.57,2015 3710,1997.43 3710,1855 3760,1805 v1(3870,1805) ; C20.2 3840.71,2023.07 3880,1983.78 v1(3880,1971.5) ; RF1.4@3913.7,1445.79 RF1.4@3913.7,1454.61 ; RF1.1@3913.7,1620 RF1.4@3913.7,1454.61 ; RF1.4 RF1.4@3913.7,1454.61 ; v1@4056.79,2197.9 v1@4145.87,2197.9 ; RF1.3@4133.7,1445.79 RF1.2@4133.7,1634.76 ; v1(4145.87,2193.4) 4152.47,2200 4210,2200 4320,2310 v1@4320,2540 ; J3.SH2@3796.3,1433.61 3796.3,1432.57 3798.81,1430.06 3817.02,1430.06 3817.09,1430 3884.68,1430 3909.29,1454.61 RF1.4@3913.7,1454.61
  other v1: 3173.85,1877.79 3278.46,2177.81 3538.98,2315.98 3477.76,3305.22 3759.3,4047.78
GSM_ANT: RF1.5 U4.32 | length 771.8
  Top Layer w20: RF1.5 4025,1975 4106.86,2056.86 U4.32
IO3: P1.8 U5.15 | length 1165
  Top Layer w10: P1.8 3253,3213 3253,3258 3495,3500 3665,3500 3930,3235 3930,3194.63 3954.63,3170 U5.15@3995,3170
IO9: P1.6 U5.17 | length 1020.5
  Top Layer w10: P1.6 3245,3330 3451,3536 3704,3536 3958.13,3281.87 3983.13,3281.87 U5.17@3995,3270
IO10: P1.5 U5.18 | length 973.3
  Top Layer w10: P1.5 3280,3430 3404,3554 3736,3554 3958.13,3331.87 3983.13,3331.87 U5.18@3995,3320
IO11: P1.4 U5.19 | length 926.1
  Top Layer w10: P1.4 3212,3572 3748,3572 3950,3370 U5.19@3995,3370
IO12: P1.3 U5.20 | length 912
  Top Layer w10: P1.3 3210,3590 3755.46,3590 3925.46,3420 U5.20@3995,3420
IO13: P1.2 U5.21 | length 932.7
  Top Layer w10: P1.2 3292,3608 3762.91,3608 3900.91,3470 U5.21@3995,3470
IO14: LED3.2 U5.22 | length 382.1
  Top Layer w10: U5.22 4035.51,3519.49 4042,3513 4042,3228 LED3.2@4075,3195
IO21: LED2.2 U5.23 | length 285.8
  Top Layer w10: U5.23 4070.51,3569.49 4125,3515 4125,3445 4105,3425 4085,3425 LED2.2@4075,3415
IO33: LED1.2 U5.24 | length 93.4
  Top Layer w10: U5.24 4044.48,3619.49 LED1.2@4075,3650
IO34: CN1.11 U5.25 | length 708.5
  Top Layer w10: U5.25 4006.93,3682.2 4034.14,3682.2 4040,3688.06 4040,3750 4030,3760 v1(4030,3860.5) v1@4025,3865.5
  Bottom Layer w20: v1(4030,3860.5) CN1.11
IO38: CN1.7 U5.31 | length 690
  Top Layer w10: U5.31@3745.79,3789.48 3757.4,3801.1 3757.4,3826.33 3948,4016.92 3948,4177 3793.8,4331.2 CN1.7
IO39: CN1.5 U5.32 | length 810
  Top Layer w10: CN1.5 3675.7,4319.3 3720,4275 3812,4275 3930,4157 3930,4024.38 3750.62,3845 3731.18,3845 3708.51,3822.32 3708.51,3802.2 U5.32@3695.79,3789.48
IO40: CN1.3 U5.33 | length 578.9
  Top Layer w10: CN1.3 3625,4264.6 3625,3835 3633.92,3826.08 3633.92,3801.35 U5.33@3645.79,3789.48
IO41: CN1.1 U5.34 | length 666.2
  Top Layer w10: CN1.1 3439.6,4330.4 3500,4270 3585,4270 3607,4248 3607,3800.69 U5.34@3595.79,3789.48
IO45: CN1.9 U5.26 | length 646.3
  Top Layer w20: U5.26@3995,3720 v1(3995,3860.5)
  Bottom Layer w20: CN1.9 3995,4248.8 v1(3995,3860.5)
IO46: P1.7 U5.16 | length 1067.9
  Top Layer w10: P1.7 3183.27,3230 3197.1,3243.83 3199.14,3243.83 3205,3249.69 3205,3250 3473,3518 3677,3518 3962.8,3232.2 3982.8,3232.2 U5.16@3995,3220
NetC17_2: C17.2 R14.2 R15.2 R16.1 | length 194.5
  Top Layer w10: v1(3455,2130) 3455,2127.29 3458.5,2123.8 3458.5,2092.67 R14.2 R14.2@3457.79,2092.68
  Top Layer w20: v1(3395,2125) 3395,2094.53 R15.2 R14.2@3457.79,2092.68
  Bottom Layer w10: v1(3395,2125) 3395.12,2125.12 3395.12,2157.56 R16.1
  Bottom Layer w30: v1(3455,2130) 3456.15,2131.15 C17.2@3456.15,2157.43
NetC18_1: C18.1 U2.6 | length 193.1
  Top Layer w10: U2.6 3489.17,1987.4 U2.6@3495,1993.23
  Top Layer w20: U2.6@3495,1993.23 3495,2000 v1(3500,2005)
  Bottom Layer w20: v1(3500,2005) 3583.85,2088.85 C18.1
NetC18_2: C18.2 L3.2 U2.5 | length 289.9
  Top Layer w20: L3.2 3642.44,1984.37 3642.44,2082.44 v1(3645,2085)
  Top Layer w25: U2.5 L3.2@3578.7,1950
  Bottom Layer w20: C18.2 3645,2131.11 v1(3645,2085)
NetJ1_2: J1.2 R7.2 | length 150.4
  Bottom Layer w15: J1.2@3175,4265 3175,4149.53 3187.46,4137.07 3187.46,4132.15 3192.76,4126.85 R7.2
NetJ2_1: J2.1 R42.2 | length 112.6
  Top Layer w20: J2.1 4261.85,4183.15 R42.2
NetJ3_A5: J3.A5 R3.2 | length 117.8
  Bottom Layer w10: R3.2@3617.33,1545 3699.33,1545 J3.A5
NetJ3_B5: J3.B5 R4.2 | length 103.1
  Bottom Layer w10: J3.B5 3825.67,1572.83 3837.91,1585.08 R4.2 ; R4.2@3834.15,1593.76 3838.15,1597.76 R4.2@3838.15,1602.68
NetLED1_1: LED1.1 R10.2
  other v1: 4095,3715
NetLED2_1: LED2.1 R9.2
  other v1: 4095,3485
NetLED3_1: LED3.1 R8.2
  other v1: 4065,3275
NETLIGHT: U4.41
NetQ1_1: Q1.1 R11.2 R28.2 | length 66.8
  Bottom Layer w10: R28.2@4144.99,3230.03 v1(4160,3230)
  Bottom Layer w20: v1(4160,3230) 4162.4,3227.6 Q1.1@4210.8,3227.6
NetR15_1: R15.1 U2.1 | length 132.2
  Top Layer w20: R15.1 3339.77,2025.23 3373.03,1991.97 3373.03,1988.23 3373.86,1987.4 U2.1
NetR17_1: R17.1 R18.2 U2.2 | length 342.4
  Top Layer w20: v1(3275,2090) 3275,2045 3315,2005 3315,1962.54 3326.72,1950.83 3385.83,1950.83 U2.2
  Bottom Layer w10: R18.2 3271.85,2084.15 3275,2087.29 v1(3275,2090)
  Bottom Layer w20: R17.1 3270.23,2094.77 v1(3275,2090) ; R18.2@3273.13,2059.25 v1@3273.13,2097.17
PWRKEY: R11.1 U5.12 | length 591.1
  Top Layer w10: U5.12 3845,3065 3860,3050 3995.18,3050 4093.44,3148.26 4177.14,3148.26 4183,3154.12 4183,3251.97 4147,3287.97 4147,3293.16 4140.19,3299.97 R11.1@4134.99,3299.97
RS485A: CN1.2 D2.2 J1.1 R39.1 U6.6 | length 679.4
  Top Layer w15: R39.1@3245,4175 3284.06,4175 3299.06,4160 U6.6@3336.77,4160
  Bottom Layer w15: J1.1 3220,4385 ; D2.2 3263.19,4144.8 3248.95,4159.04 3235.96,4159.04 v1(3235,4160) 3250,4175 3250,4355 3220,4385 ; CN1.2 3325,4450 3260,4385 3220,4385
RS485B: CN1.4 D2.1 R7.1 R36.2 U6.7 | length 883.4
  Top Layer w15: R36.2 3241.85,4066.25 3247.15,4060.96 3249.04,4060.96 v1(3250,4060) ; R36.2@3241.85,4082.68 3236.56,4087.97 3236.56,4098.44 3215,4120 3170,4120 3140,4150 3140,4195 3165,4220 3188.38,4220 3363.38,4395 3502.7,4395 CN1.4 ; R36.2@3245.96,4065.96 3268.71,4065.96 3317.76,4115 U6.7
  Bottom Layer w15: R7.1 3201.49,4065.96 3244.04,4065.96 v1@3245,4065
RS485DRE: U5.35 U6.2 U6.3 | length 728
  Top Layer w10: v1(3465,4155) 3465,4159.14 3470.86,4165 U6.3 U6.2 ; v1(3544.3,3727.78) 3544.3,3788 U5.35@3545.79,3789.48
  Bottom Layer w10: v1(3465,4155) 3439.14,4129.14 3439.14,3744.14 3458.28,3725 3540,3725 v1@3545,3730
RS485RXD: U5.39 U6.1 | length 460.3
  Top Layer w10: U5.39@3345.79,3789.48 3344.53,3790.74 3344.53,3884.38 3378.65,3918.5 3493.04,3918.5 3566.1,3991.56 3566.1,4058.19 3559.29,4065 U6.1
RS485TXD: U5.38 U6.4 | length 600.5
  Top Layer w10: U5.38@3390,3785.78 3390,3879.14 3411.36,3900.5 3500.5,3900.5 3589,3989 3589,4188.24 3562.24,4215 U6.4
RST4G: U4.29
RTS: Q2.2 Q3.1 U10.6 | length 242.1
  Bottom Layer w20: Q2.2 3600.8,4142.5 ; Q3.1 3600.8,4142.5 ; v1@3655,4005 3650,4010 3650,4130.78 3638.28,4142.5 3600.8,4142.5
  other v1: 3654.3,4002.78
RXD7680: U4.2 U8.4 | length 122.2
  Top Layer w10: U4.2@4106.87,2897.08 U4.2 4106.87,2973.25 4125.24,2991.61 U8.4@4145.31,2991.61
RXDMCU: U5.8 U8.1 | length 611.3
  Top Layer w10: U5.8@3631.73,3088.27 3631.73,3063.27 3717,2978 4025,2978 4112.51,3065.51 4142.44,3065.51 U8.1@4145.31,3068.39
SDCLK: J.T5 R43.3 U5.6 | length 979.9
  Top Layer w10: v1(3330,2600) 3315,2615 3315,2670 3329.25,2684.25 R43.3@3359.69,2684.25 ; v1(3455,2790) 3518,2853 3518,2918 3545,2945 U5.6@3545,3095.66
  Bottom Layer w10: v1(3330,2600) 3365,2600 ; J.T5 3376.97,2458.03 3365,2470 3365,2600 ; v1(3455,2790) 3455,2787.29 3460,2782.29 3460,2630 3433,2603 3368,2603 3365,2600
SDCMD: J.T3 R43.2 U5.4 | length 592.5
  Top Layer w10: R43.2 3343.27,2722.17 3329.81,2722.17 3315,2736.97 3315,2845 3340,2870 v1(3430,2870) 3445,2885 U5.4@3445,3101.36
  Bottom Layer w10: v1(3430,2870) 3430,2872.71 3445.67,2888.38 J.T3@3445.67,2940.67 ; J.T3@3445.63,2941.3 J.T3
SDCS: J.T2 R43.1 U5.5 | length 547.9
  Top Layer w10: R43.1@3359.69,2753.15 3359.69,2839.14 3365.55,2845 3469.14,2845 3473.09,2848.94 3473.09,2858.09 v1(3475,2860) 3500,2885 U5.5@3500,3098.84
  Bottom Layer w10: v1@3478.94,2866.64 J.T2@3478.94,2950
SDD0: J.T7 R43.4 U5.7 | length 950.3
  Top Layer w10: R43.4@3359.69,2646.85 3359.69,2593.71 3371.89,2581.51 3386.09,2581.51 v1(3388,2579.6) 3390.71,2579.6 3395.42,2584.31 3398.64,2584.31 3445,2630.66 3445,2740 3536,2831 3536,2906 3600,2970 U5.7@3600,3099.57
  Bottom Layer w10: v1(3388,2579.6) 3388.4,2580 3443.4,2580 3480.91,2542.5 J.T7
SIM_CLK: J.S3_C3 U4.16 U9.4 | length 653.6
  Top Layer w10: U9.4 3207.52,2615.71 3207.52,2602.51 3206,2600.99 3206,2517.44 3236.98,2486.46 3392.44,2486.46 3509,2603.02 3509,2628.02 3520.98,2640 3530,2640 3542.19,2652.19 U4.16@3566.49,2652.19
  Bottom Layer w10: v1(3290,2486.46) 3308.84,2467.62 3308.84,2400.49 J.S3_C3
SIM_DATA: C8.2 J.S7_C6 U4.15 U9.5 | length 779
  Top Layer w10: C8.2@3235,2550 U9.5 ; C8.2 3265.85,2509.46 3389.99,2509.46 3491,2610.47 3491,2661 3515,2685 3556,2685 U4.15@3564.84,2693.84
  Bottom Layer w10: v1(3235,2570) 3235,2525 3250,2510 3336.46,2510 3342.32,2504.14 J.S7_C6
SIM_RST: J.S2_C2 U4.17 U9.3 | length 952.3
  Top Layer w10: v1(3193,2700) 3192.57,2700 3189.52,2696.95 3189.52,2693.92 v1@3188,2692.4 ; U9.3 v1@3188,2692.4 ; U4.17@3545,2600 3531.44,2600 3394.9,2463.46 3234.52,2463.46 3188,2509.98 v1@3188,2692.4
  Bottom Layer w10: v1(3193,2700) 3193,2783 3250,2840 3280,2840 3307.68,2867.68 J.S2_C2
SIM_VDD: C6.2 C7.2 J.S1_C1 U4.18 U9.1 | length 1204.2
  Top Layer w10: C7.2@3195,2821.11 3197.1,2819.01 C6.2 3186.35,2742.46 3172.46,2742.46 3170,2740 3170,2502.53 3227.07,2445.46 3405.46,2445.46 3518.98,2558.98 3559.9,2558.98 U4.18@3564.8,2563.88 ; C7.2@3195,2823.21 v1(3195,2870) ; U9.1 3260.59,2701.26 3290,2730.67 3290,2845 3281.07,2853.93 3281.07,2873.09 v1(3279.15,2875)
  Bottom Layer w10: v1(3195,2870) 3265.29,2870 3270.29,2875 v1@3273,2875 ; J.S1_C1@3273,2940.64 v1@3273,2875 ; v1(3279.15,2875) v1@3273,2875
TXD7680: U4.1 U8.5 | length 139.7
  Top Layer w10: U4.1@4145.17,2920.42 U4.1@4145.17,2922.92 ; 4164.14,2914.4 4239.75,2990 U8.5@4270,2990
TXDMCU: U5.9 U8.8 | length 697.3
  Top Layer w10: U5.9@3695,3075 3695,3040 3739,2996 4017.54,2996 4113.3,3091.76 4227.37,3091.76 4250.75,3068.39 U8.8
U0RXD: U5.36 U10.8 | length 381.1
  Top Layer w15: U5.36@3495.79,3789.48 3506.01,3799.7 3506.01,3841.21 v1@3514.79,3850 ; v1@3679.3,3851.17 3679.3,3884.3 3736.32,3941.32 3736.32,3969.16 U10.8
  Bottom Layer w15: v1(3514.3,3852.78) v1(3679.3,3852.78)
U0TXD: U5.37 U10.9 | length 416.4
  Top Layer w10: v1(3710.53,3879.47) 3712.44,3881.38 3712.44,3884.61 3773.19,3945.35 3773.19,3966.03 U10.9@3780.63,3973.47
  Top Layer w15: U5.37@3445.79,3789.48 U5.37@3448.79,3792.48 ; 3455,3820 3455,3834.51 3499.53,3879.04 3524.04,3879.04 v1(3525,3880)
  Bottom Layer w15: v1(3525,3880) 3710,3880 v1(3710.53,3879.47)
USB5V: C21.1 C22.1 D1.1 J3.A4 J3.A9 J3.B4 J3.B9 R18.1 U2.3 | length 1630.2
  Top Layer w10: C22.1@3263.54,1966.46 C22.1@3263.54,1990.24
  Top Layer w15: J3.A4 3722.31,1484.25 3714.19,1492.37 3713.33,1492.37 3630,1575.71 v1(3630,1690) 3670,1730 3812.31,1730 3829.52,1712.8 3829.52,1605.12 3810.61,1586.21 3780.6,1586.21 3766.67,1600.15 3765.81,1600.15 3757.69,1608.27 J3.B4
  Top Layer w25: C22.1 3250.71,1973.07 3313.78,1910 3352.4,1910 3355,1912.6 U2.3
  Bottom Layer w15: D1.1 3654.35,1492.07 3665.96,1503.69 3697.46,1503.69 3708.77,1492.37 3714.19,1492.37 3722.31,1484.25 J3.A4 3726.3,1482.6 3736.1,1482.6 3744.04,1474.66 3744.9,1474.66 3753.02,1466.54 J3.B9 ; J3.A9 3726.98,1625.98 3735.1,1617.86 3735.96,1617.86 3743.9,1609.92 3753.7,1609.92 J3.B4
  Bottom Layer w30: C21.1@3170,1955 3180,1955 3185,1960 ; C21.1@3170,1960 3170,2007.56 3212.05,2049.61 3212.56,2049.61 3214.77,2051.81 R18.1 ; v1(3335,1910) 3335,1863.11 3429.05,1769.06 3560.95,1769.06 3630,1700 v1(3630,1690)
  other v1: 3175,1960
USB_D+: D4.1 J3.A6 J3.B6 U10.1 | length 2935.7
  Top Layer w10: v1(3820,1525) 3868.02,1573.02 3868.02,1723.02 v1(3880,1735)
  Bottom Layer w10: J3.A6 3728.33,1555.12 3743.44,1540.01 3752.75,1540.01 J3.B6 3824.94,1537.4 3837.44,1524.89 D4.1 ; v1(3819.3,4152.78) 3819.3,4150.08 3833,4136.38 3833,3796.03 3769.35,3732.38 3769.35,3593.12 3806.31,3556.16 3806.31,3414.14 3974,3246.46 3974,2203.95 3941,2170.95 3941,1939.88 3932,1930.88 3932,1787 v1(3880,1735)
USB_D-: D5.1 J3.A7 J3.B7 U10.2 | length 3437.7
  Top Layer w10: J3.A7 3723.46,1589.36 3670.98,1589.36 3652.98,1607.36 3652.98,1672.17 3680.81,1700 v1(3785,1700) ; J3.B7 3850.02,1596.63 3850.02,1728.07 3822.59,1755.5 v1(3785,1755.5)
  Bottom Layer w10: D5.1@3617.56,1592.07 3620.27,1589.36 3723.46,1589.36 J3.A7 ; v1(3779.3,4152.78) 3815,4117.09 3815,3803.48 3751.35,3739.83 3751.35,3585.66 3788.31,3548.7 3788.31,3406.69 3956,3239 3956,2211.4 3923,2178.4 3923,1947.34 3914,1938.34 3914,1799.4 3889.05,1774.45 3886.92,1774.45 3867.97,1755.5 v1(3785,1755.5) v1(3785,1700)
USBBOOT: U4.20
USBDN: U4.26 U5.13 | length 1193.4
  Top Layer w10: v1(3840,2235) 3840,2237.71 3843.66,2241.37 3843.66,2301.26 U4.26@3842.02,2302.9 ; v1(3873.53,3170) 3873.53,3167.29 3878.53,3162.29 3878.53,3159.24 3878.62,3159.14 3878.62,3154.57 3883.07,3150.11 U5.13@3883.07,3103.6
  Bottom Layer w10: v1(3840,2235) 3840,2324.54 3928,2412.54 3928,3183.67 3918.67,3193 3898,3193 3875,3170 v1(3873.53,3170)
USBDP: U4.25 U5.14 | length 1155.1
  Top Layer w10: v1(3790,2235) 3790,2237.71 3798.71,2246.42 U4.25@3798.71,2302.91 ; v1(3901.53,3164) 3903.44,3162.09 3922.91,3162.09 3933.07,3151.93 3933.07,3096.93 U5.14@3940,3090
  Bottom Layer w10: v1(3790,2235) 3790,2300 3910,2420 3910,3153.14 3901.53,3161.62 v1(3901.53,3164)
VCC33: C2.2 C3.2 C41.2 C43.2 C44.2 J.T4 P1.9 R1.2 R2.2 R5.2 R6.2 R8.1 R9.1 R10.1 R39.2 R43.5 R43.6 R43.7 R43.8 U1.5 U3.8 U5.2 U6.8 U7.3 U8.7 U10.7 U10.10 | length 7488.5
  Top Layer w10: v1(3380,3280) 3380,3315 v1(3415,3350)
  Top Layer w15: R39.2 3183.15,4182.24 3265.91,4265 3385,4265 3435,4215 3435,4214.35 3435.5,4213.85 3435.5,4045.5 3419.62,4029.62 3357.9,4029.62 ; U6.8@3357.9,4066.04 3357.9,4029.62 ; R43.5 R43.6 R43.7 R43.8 3410.32,2798.97 3425,2813.65 v1(3425,2815) ; C44.2 C43.2 3357.9,4029.62 ; v1(3668.94,3911.06) 3670.29,3911.06 3687.39,3928.16 3688.16,3928.16 3696.95,3936.95 3696.95,3969.16 U10.7 ; v1(3741.79,3878.21) 3742.75,3879.16 3754.16,3879.16 3815.06,3940.06 3815.06,3969.16 U10.10 ; U10.10@3818.74,3990.56 3823.68,3995.5 3862.51,3995.5 v1(3891.01,4023.99) ; U7.3 4200,3780 v1(4255,3725) 4335,3645 4335,3455 4311.4,3431.4 4307.9,3431.4 U3.8@4305,3428.5 ; v1(4261.85,3494.82) 4280.18,3494.82 4305,3470 U3.8@4305,3428.5 ; U8.7 4290.06,3043.17 4327.22,3043.17 4335.63,3051.58 4335.63,3143.31 4250.29,3228.65 4250.29,3305.29 4301.02,3356.02 4301.02,3398.58 U3.8 U3.8@4305,3428.5
  Top Layer w20: P1.9 3170,2940 ; U5.2@3340,3116.44 3338.07,3118.37 3338.07,3146.93 v1(3335,3150) 3335,3155 3300,3190 3275,3190 3250,3165 3250,3020 3170,2940 ; v1(3350,3010) U5.2@3350,3101.41 ; U1.5@3865,2125 3670,2125 3375,2420 3220,2420 3144.63,2495.37 3144.63,2914.63 3170,2940
  Bottom Layer w10: v1(3335,3150) 3335,3172.05 C3.2 C2.2 3341.15,3281.14 3347.01,3287 3370.29,3287 3377.29,3280 v1(3380,3280) 3381.91,3281.91 3393.02,3281.91 3398.1,3287 3445.01,3287 3472.09,3259.92 R1.2
  Bottom Layer w15: v1(3415,3350) 3415,3475 3590,3650 3590,3745 3572.5,3762.5 3487.5,3762.5 3460,3790 3460,3920 ; v1@3460,4005 3460,3920 ; v1(3668.94,3911.06) 3468.94,3911.06 3460,3920 ; v1@3670,3910 3716.06,3910 3736.03,3890.03 3736.03,3885.32 3741.79,3879.56 v1(3741.79,3878.21) ; R2.2 3823.15,3702.6 3894.5,3773.95 3894.5,3834.5 3895,3835 ; v1(3891.01,4023.99) 3891.01,4022.64 3895,4018.65 3895,3835 ; R8.1 4103.7,3214.77 4112.48,3223.55 4112.48,3318.25 4120,3325.76 4120,3419.47 4114.7,3424.77 4107.76,3424.77 4102.46,3430.06 4102.46,3430.77 4093.68,3439.56 4080.44,3439.56 4080,3440 4048.79,3440 4040,3448.79 4040,3543.3 4063.79,3567.09 4103.89,3567.09 4112.68,3575.87 R10.1@4112.68,3654.77 ; R10.1@4117.6,3655 4185,3655 v1(4255,3725) ; v1(4210,3875) 4210,3843.79 4201.21,3835 3895,3835 ; v1(4261.85,3494.82) R6.2@4261.85,3532.32 ; R5.2@4265,3470 4265,3507.5
  Bottom Layer w20: v1(3350,3010) 3375.55,2984.45 3375.55,2942.09 J.T4 3376.97,2858.03 v1@3420,2815 ; v1@3422.08,2812.92 v1@3420,2815 ; v1(3425,2815) v1@3420,2815
  other v1: 3464.3,4007.78
VCC42: C1.2 C17.1 C19.1 C20.1 L3.1 R14.1 U1.1 U1.3 U4.34 U4.35 | length 1859.1
  Top Layer w10: L3.1@3720,1981.93 L3.1
  Top Layer w20: v1(3712.76,2085.22) 3720,2077.98 L3.1@3720,1981.93
  Top Layer w30: v1(3515,2130) 3515,2092.56 R14.1 ; U1.1 3864.59,2010.32 3861.4,2013.51 3848.74,2013.51 3847.25,2015 3771.3,2015 3746.93,1990.63 L3.1 3746.93,1914.37 3771.3,1890 3950,1890 v1(3960,1900) ; 3945,1900 U1.3@3945,2008.82 ; v1(4100,1900) 4105,1900 4253.86,2048.86 U4.35@4253.86,2464.82
  Bottom Layer w10: C19.1@3712.76,2132.12 C19.1
  Bottom Layer w20: v1(3712.76,2085.22) C19.1@3712.76,2132.12
  Bottom Layer w30: v1(3515,2130) 3515.41,2130.41 3515.41,2156.04 3516.9,2157.54 3516.9,2182.43 3534.48,2200 3695.52,2200 3713.1,2182.43 3713.1,2133.96 C19.1 ; v1(3960,1900) v1(4100,1900)
  other v1: 3766.46,1895
VDDEXT1V8: U4.40 U8.3 U8.6 | length 580.6
  Top Layer w10: U8.3@4140.31,3017.2 4143.19,3020.08 4167.98,3020.08 4169.13,3021.22 U8.6@4274.69,3021.22 ; U4.40 4259.83,2689.96 4317.92,2689.96 4330.64,2702.68 4330.64,3003.72 4320.03,3014.33 4308.1,3014.33 4302.35,3020.08 U8.6@4274.69,3020.08
pads on no net: CN1.17 CN1.18 J.G1 J.G2 J.G3 J.G4 J.G5 J.G6 J.G7 J.G8 J.S4 J.S6_C5 J.S8 J.S/W J.T1 J.T8 U1.4 U3.1 U3.2 U3.3 U3.7 U4.3 U4.4 U4.5 U4.6 U4.7 U4.9 U4.10 U4.11 U4.12 U4.14 U4.22 U4.23 U4.24 U4.28 U4.38 U4.42 U4.43 U4.44 U4.45 U4.46 U4.47 U4.48 U4.49 U4.50 U4.51 U4.52 U4.53 U4.54 U4.55 U4.56 U4.57 U4.58 U4.59 U4.60 U4.61 U4.62 U4.63 U4.64 U4.65 U4.66 U4.67 U4.68 U4.69 U4.70 U4.71 U4.72 U4.73 U4.74 U4.75 U4.76 U4.77 U4.78 U4.79 U4.80 U4.81 U4.82 U4.83 U4.84 U4.85 U4.86 U4.87 U4.88 U4.89 U4.90 U4.91 U4.92 U7.5 U9.6 U10.5
copper on no net:
  other v2: 3551.56,3335.15 3599.06,3335.15 3646.56,3335.15 3551.56,3385.15 3599.06,3385.15 3646.56,3385.15 3551.56,3435.15 3599.06,3435.15 3646.56,3435.15

## Keep-outs
Keep-Out Layer:
  circle w0.25: c4277.47,4588.33 r0.12
  circle w0.5: c4245.94,4569.52 r72.83
  circle w0.5: c3222.52,1498.84 r72.83
  circle w0.25: c3275.87,4549.14 r0.12
  circle w0.25: c4347.7,4607.64 r0.12
  circle w0.5: c3222.52,4569.52 r72.83
  circle w0.25: c4277.47,4588.33 r0.12
  circle w0.5: c4245.94,1498.84 r72.83
  lines w0.5: 3116.38,1393.33 3116.38,4698.33 4351.38,4698.33 4351.38,1393.33 3116.38,1393.33

## Silkscreen, mask and mechanical layers (free items; w line width, h text height)
Top Overlay:
  circle w0.5: c4245.94,1498.84 r63.23
  circle w0.5: c3222.52,1498.84 r63.23
  circle w0.5: c4245.94,4569.52 r63.23
  circle w0.5: c3222.52,4569.52 r63.23
Mechanical 8:
  circle w0.25: c4363.02,4569.52 r0.12
Mechanical 15:
  lines w0.1: 3705.41,1499.57 3705.43,1499.59 ; 3741.07,2867.63 3741.09,2867.61 ; 3743.56,4721.11 3743.58,4721.13 ; 3750.09,4569.51 3750.11,4569.53 ; 4548.37,1505.17 4548.39,1505.19 ; 3687.14,5008.24 3687.16,5008.26 ; 3766.29,1402.25 3766.31,1402.27